# EAGLE board shield_horiz (EAGLE 6.5.0)
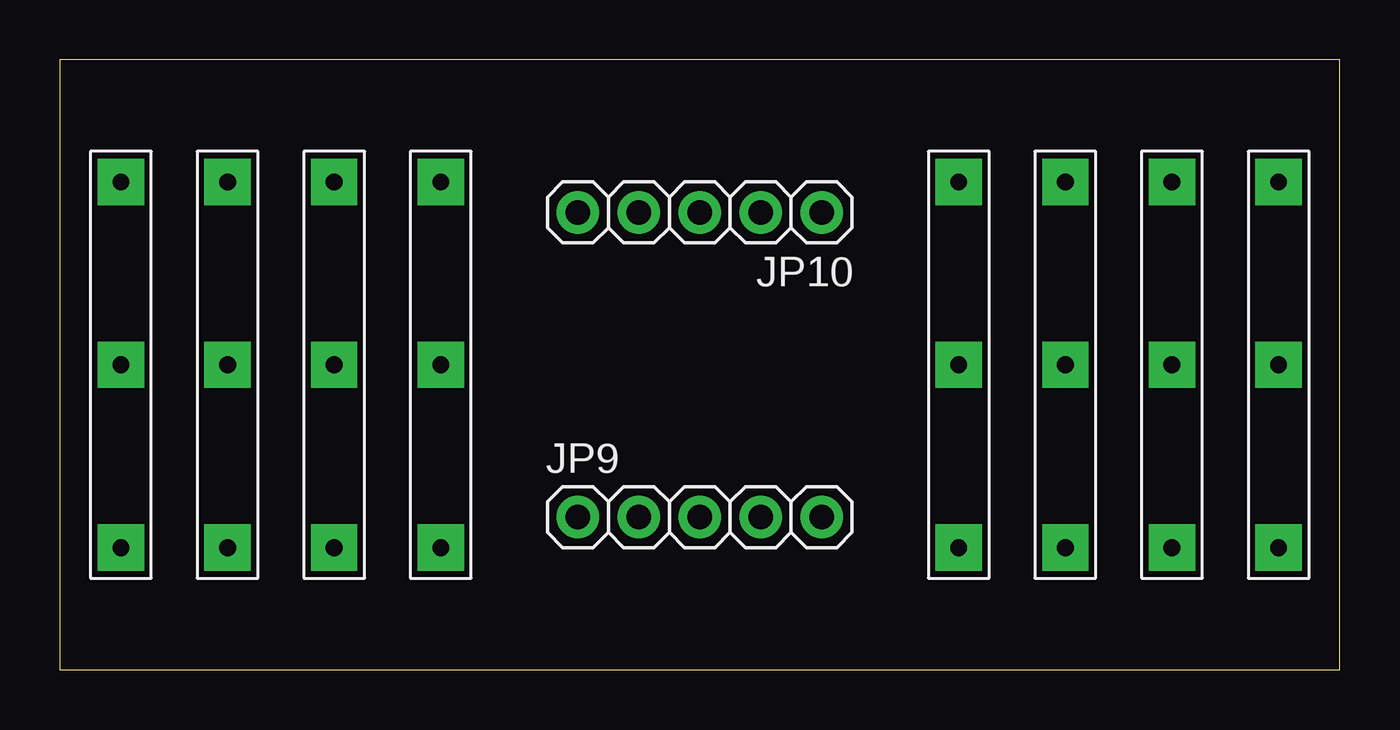
[diagram p0: board, top side]
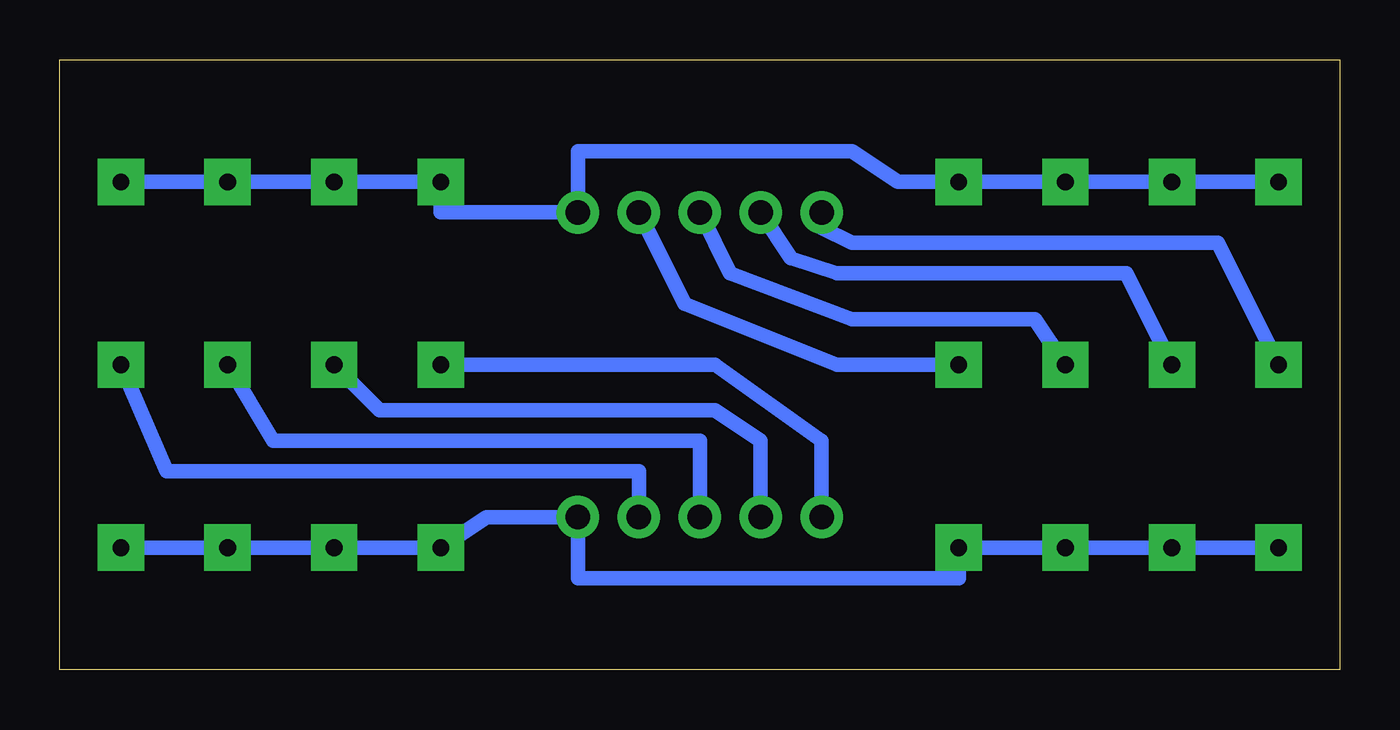
[diagram p1: board, bottom side, seen from below]

Size 53.34 x 25.4 mm. Coordinates in mm from the lower left corner, seen from the top.
Outline: 0,0 53.34,0 53.34,25.4 0,25.4 0,0
Copper layers (1*16): Top 0.035mm / dielectric 1.5mm / Bottom 0.035mm
Design rules "default": minimum track width 10mil, minimum drill 24mil, track to track 8mil, track to pad 8mil, pad to pad 8mil, via to via 8mil, smd to smd 8mil, copper to edge 40mil, drill to drill 8mil, minimum pad ring 10mil, minimum via ring 8mil, stop-mask expansion 4mil, vias tented up to drill 0mil, thermal gap 10mil

## Footprints (pad centres in the part's own frame; a part is rotated, then mirrored left to right if it is on the bottom)
1X03-POTENTIOSHIELD = drill 0.7 pad 1.93 square: 1 -7.62,0; 2 0,0; 3 7.62,0
1X05 = drill 1.016 pad 1.778: 1 -5.08,0; 2 -2.54,0; 3 0,0; 4 2.54,0; 5 5.08,0

## Placement (x,y rotation side)
JP1  [1X03-POTENTIOSHIELD]  37.47,12.7 270 top
JP2  [1X03-POTENTIOSHIELD]  41.91,12.7 270 top
JP3  [1X03-POTENTIOSHIELD]  46.35,12.7 270 top
JP4  [1X03-POTENTIOSHIELD]  50.8,12.7 270 top
JP5  [1X03-POTENTIOSHIELD]  15.88,12.7 270 top
JP6  [1X03-POTENTIOSHIELD]  11.43,12.7 270 top
JP7  [1X03-POTENTIOSHIELD]  6.99,12.7 270 top
JP8  [1X03-POTENTIOSHIELD]  2.54,12.7 270 top
JP9  [1X05]  26.67,6.35 0 top
JP10  [1X05]  26.67,19.05 180 top

## Library data of the parts
JP1-JP10 = manticore-lib

## Nets
GND: JP1.1 JP2.1 JP3.1 JP4.1 JP5.1 JP6.1 JP7.1 JP8.1 JP10.1
N$1: JP1.2 JP9.1
N$2: JP2.2 JP9.2
N$3: JP3.2 JP9.3
N$4: JP4.2 JP9.4
N$5: JP5.2 JP10.2
N$6: JP6.2 JP10.3
N$7: JP7.2 JP10.4
N$8: JP8.2 JP10.5
VCC: JP1.3 JP2.3 JP3.3 JP4.3 JP5.3 JP6.3 JP7.3 JP8.3 JP9.5

## Tracks (layer width: path | path; a pad name or v marks a point on that pad's centre or on a via)
GND
  Bottom 0.61: JP8.1 JP7.1 JP6.1 JP5.1 18.41,20.32 20.32,21.59 31.75,21.59 JP10.1 37.47,19.05 JP1.1 JP2.1 JP3.1 JP4.1
N$1
  Bottom 0.61: JP1.2 26.04,12.7 21.59,9.53 JP9.1
N$2
  Bottom 0.61: JP2.2 40.01,10.79 26.04,10.79 24.13,9.53 JP9.2
N$3
  Bottom 0.61: JP3.2 44.45,9.53 26.67,9.53 JP9.3
N$4
  Bottom 0.61: JP4.2 48.9,8.26 29.21,8.26 JP9.4
N$5
  Bottom 0.61: JP10.2 27.3,15.24 20.95,12.7 JP5.2
N$6
  Bottom 0.61: JP10.3 25.4,16.51 20.32,14.61 12.7,14.61 JP6.2
N$7
  Bottom 0.61: JP10.4 22.86,17.14 20.95,16.51 8.89,16.51 JP7.2
N$8
  Bottom 0.406: JP10.5 21.59,18.41
  Bottom 0.61: 21.59,18.41 20.32,17.78 5.08,17.78 JP8.2
VCC
  Bottom 0.61: JP8.3 JP7.3 JP6.3 JP5.3 15.88,3.81 31.75,3.81 JP9.5 35.56,6.35 JP1.3 JP2.3 JP3.3 46.99,5.08 JP4.3